# EAGLE board Sendeeinheit (EAGLE 7.7.0)
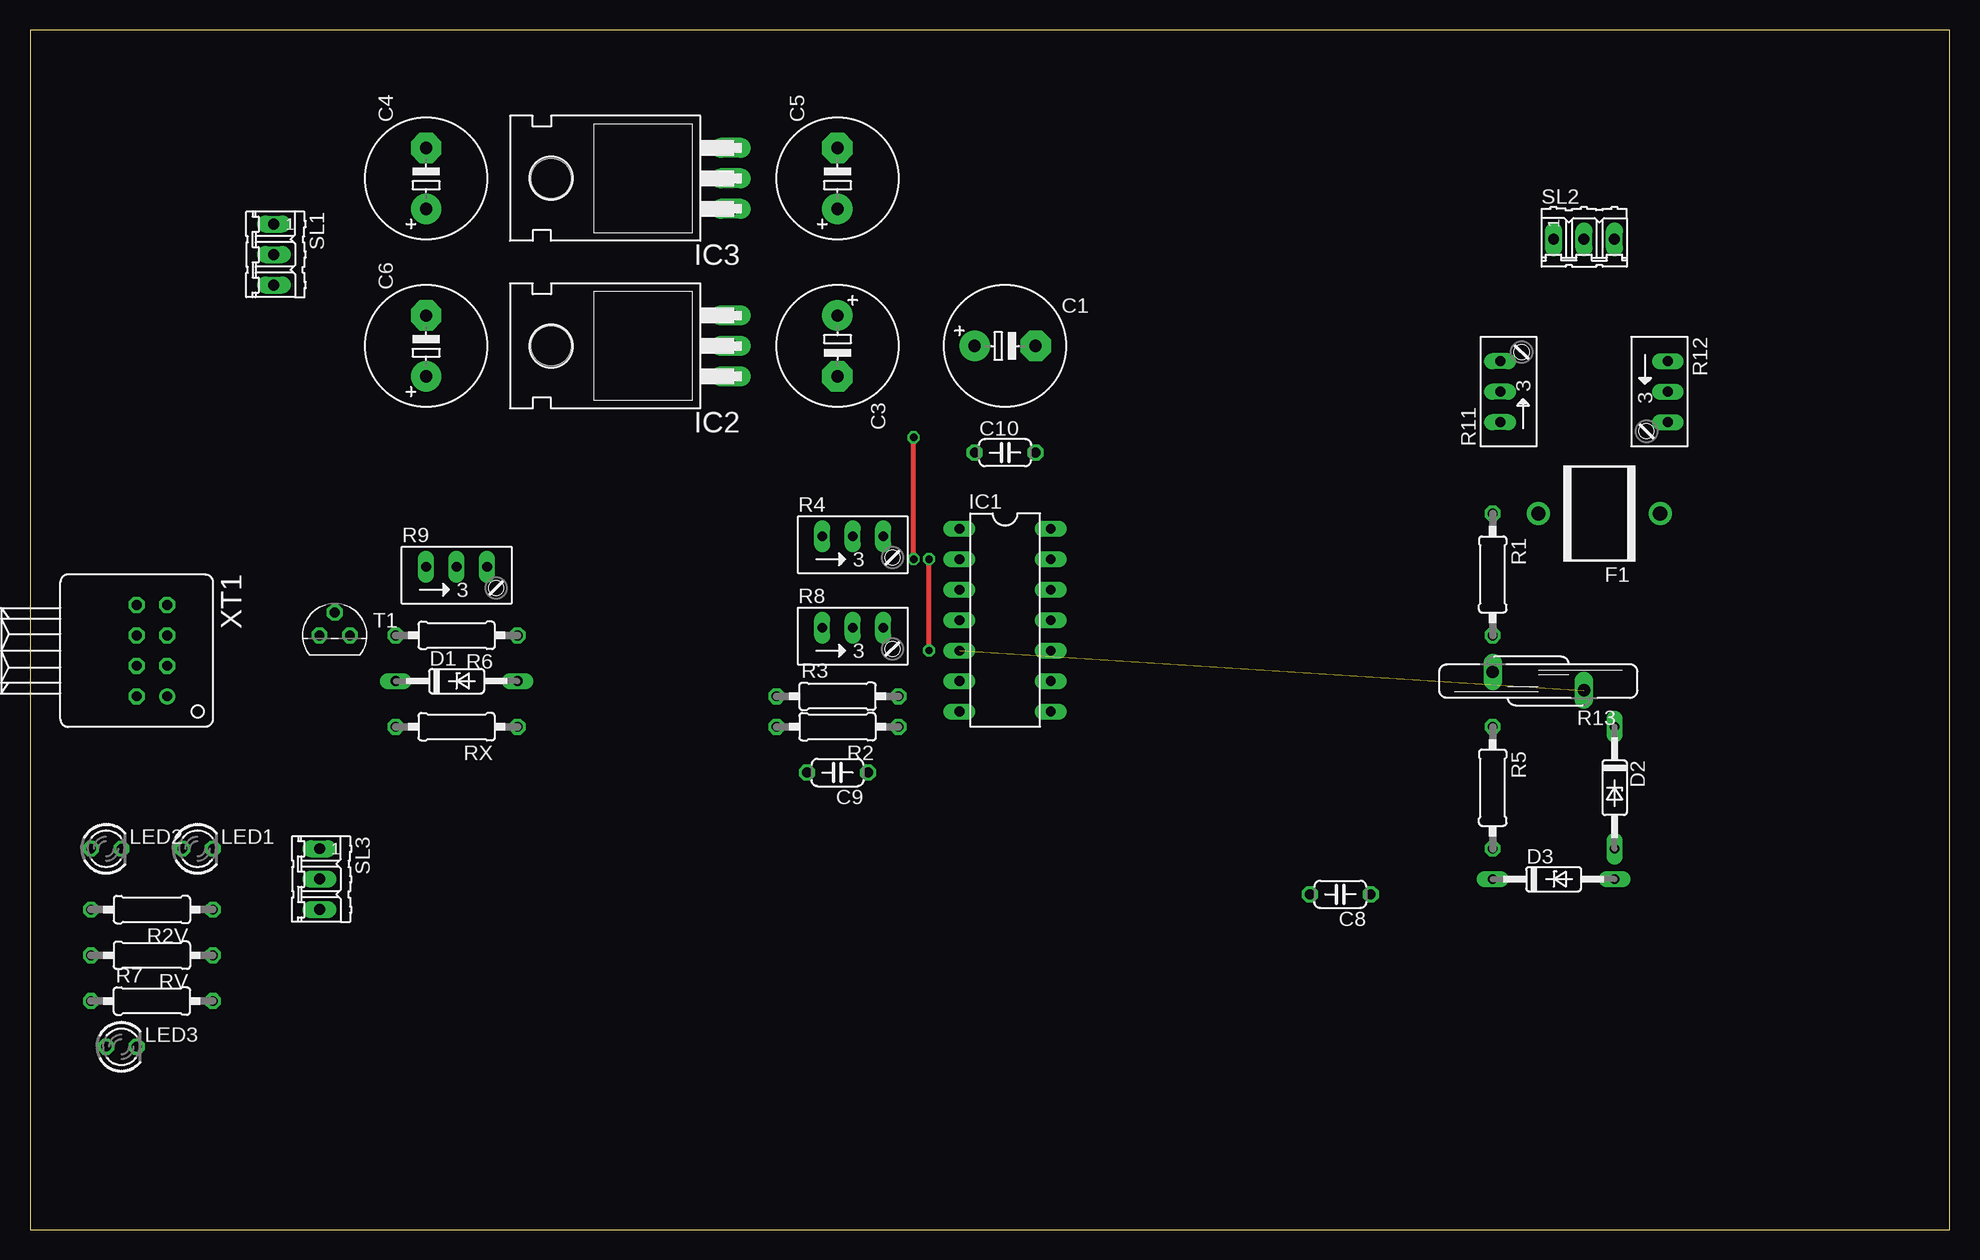
[diagram p0: board, top side]
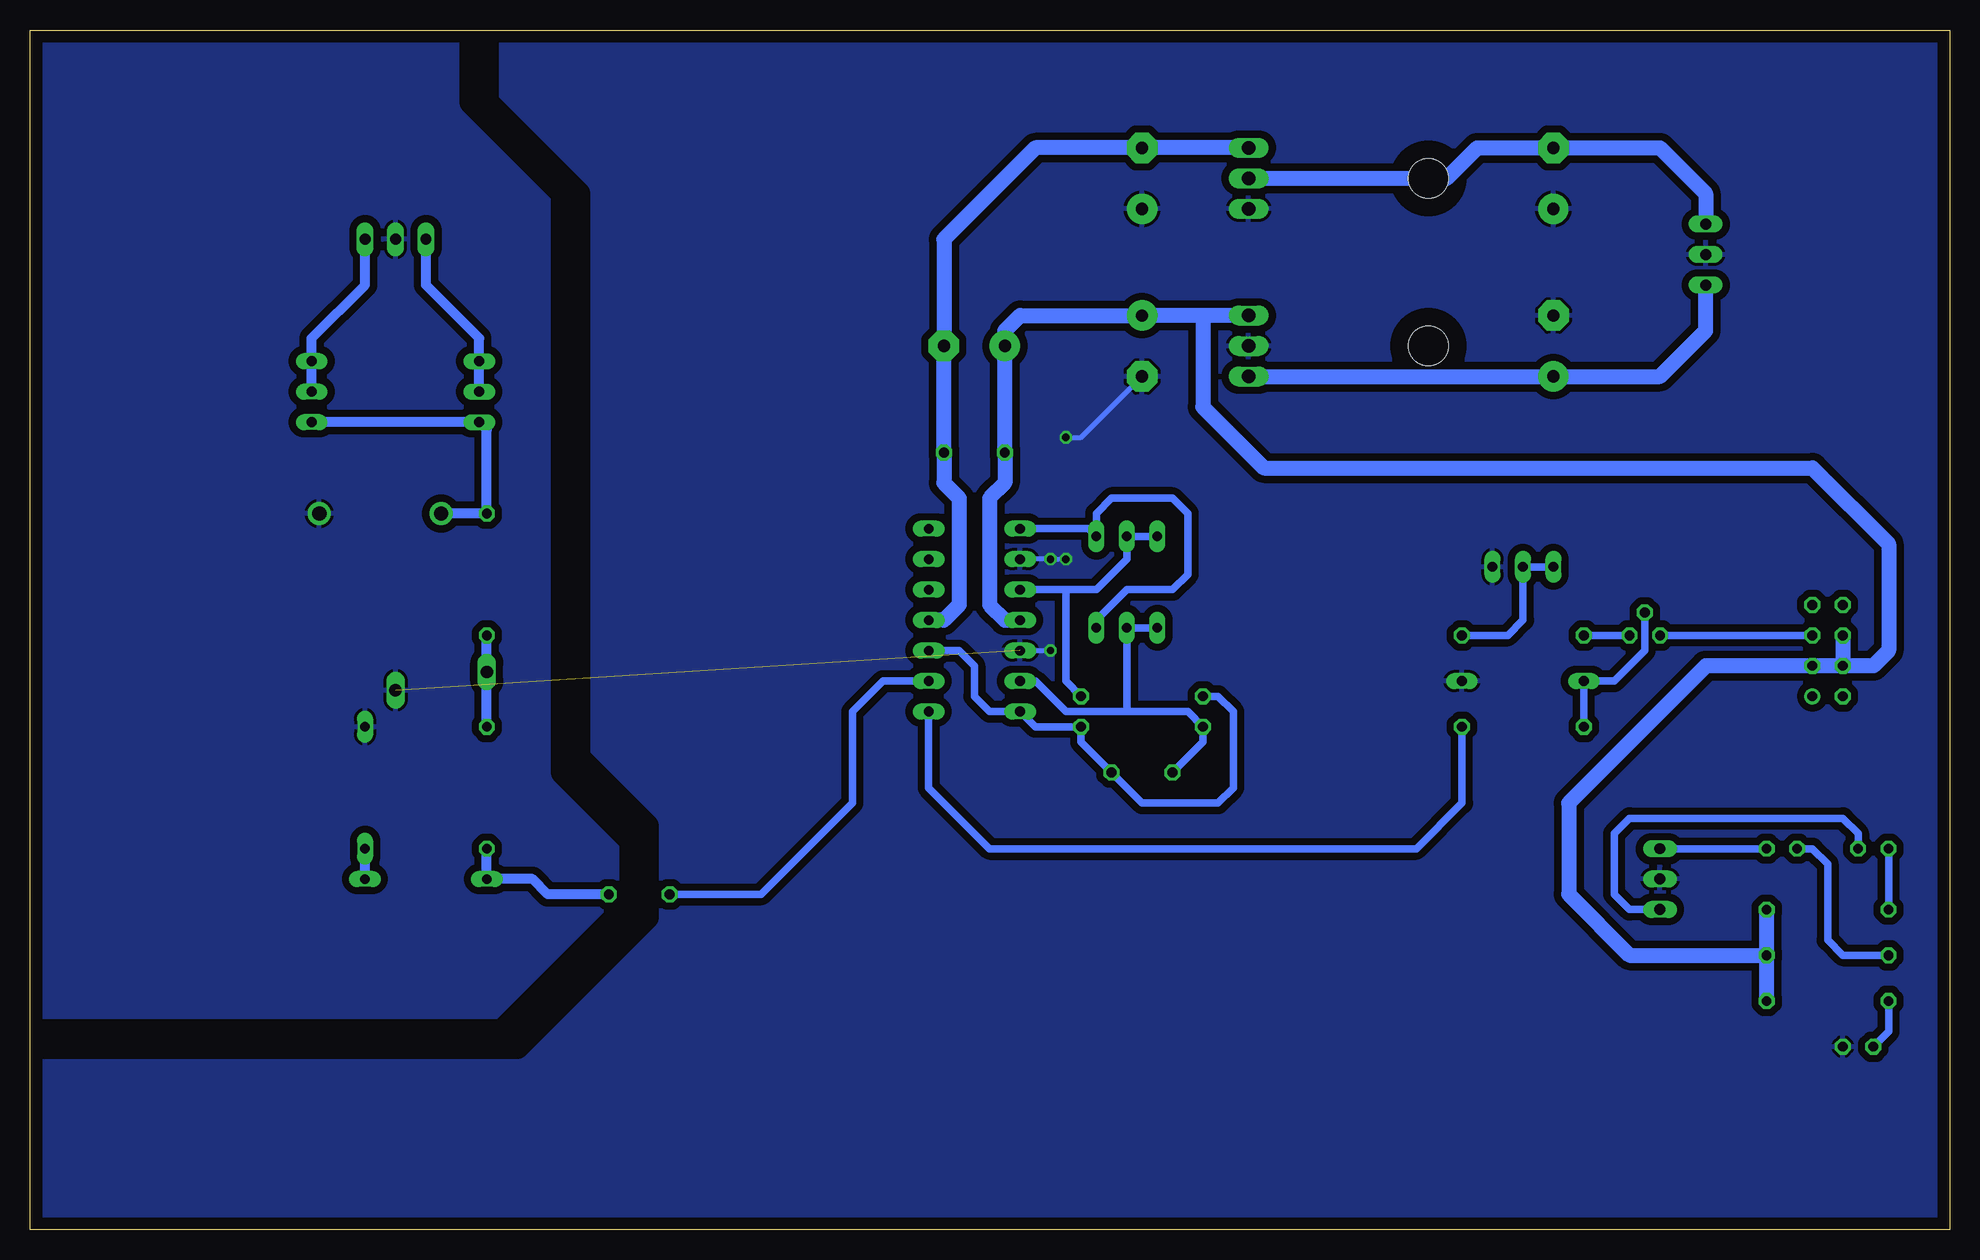
[diagram p1: board, bottom side, seen from below]

Size 160 x 100 mm. Coordinates in mm from the lower left corner, seen from the top.
Outline: 0,0 160,0 160,100 0,100 0,0
Copper layers (1*16): Top 0.035mm / dielectric 1.5mm / Bottom 0.035mm
Design rules "default": minimum track width 10mil, minimum drill 24mil, track to track 8mil, track to pad 8mil, pad to pad 8mil, via to via 8mil, smd to smd 8mil, copper to edge 40mil, drill to drill 8mil, minimum pad ring 10mil, minimum via ring 8mil, stop-mask expansion 4mil, vias tented up to drill 0mil, thermal gap 10mil
bRestrict: area 108.6,15.2 to 160,99.1

## Footprints (pad centres in the part's own frame; a part is rotated, then mirrored left to right if it is on the bottom)
E5-10,5 = drill 1.016 pad 2.54: + -2.54,0 | drill 1.016 pad 2.54 octagon: - 2.54,0
C050-024X044 = drill 0.813 octagon: 1 -2.54,0; 2 2.54,0
DO35Z10 = drill 0.813 long: A 5.08,0; C -5.08,0
EPCOS_N81 = drill 1.2 pad 1.93: 1 -5.08,0; 2 5.08,0
DIL14 = drill 0.813 long: 1 -7.62,-3.81; 2 -5.08,-3.81; 3 -2.54,-3.81; 4 0,-3.81; 5 2.54,-3.81; 6 5.08,-3.81; 7 7.62,-3.81; 8 7.62,3.81; 9 5.08,3.81; 10 2.54,3.81; 11 0,3.81; 12 -2.54,3.81; 13 -5.08,3.81; 14 -7.62,3.81
TO220H = drill 1.118 long: 1 -2.54,-10.16; 2 0,-10.16; 3 2.54,-10.16 | hole 3.302: 0,4.826
LED3MM = drill 0.813 octagon: A -1.27,0; K 1.27,0
0207/10 = drill 0.813 octagon: 1 -5.08,0; 2 5.08,0
RJ9W = drill 0.813 long: A 2.54,0.635; E -2.54,0.635; S 0,0.635
S14K11 = drill 1.016 long: 1 -0.762,-3.81; 2 0.762,3.81
03P = drill 0.914 long: 1 -2.54,0; 2 0,0; 3 2.54,0
TO92 = drill 0.813 octagon: 1 1.27,0; 2 0,1.905; 3 -1.27,0
HFBR-X41X = drill 0.813: 1 3.81,2.54 | drill 0.813 octagon: 2 1.27,2.54; 3 -1.27,2.54; 4 -3.81,2.54; 5 -3.81,0; 6 -1.27,0; 7 1.27,0; 8 3.81,0

## Placement (x,y rotation side)
C1  [E5-10,5]  81.28,73.66 0 top
C3  1µ  [E5-10,5]  67.31,73.66 270 top
C4  300n  [E5-10,5]  33.02,87.63 90 top
C5  1µ  [E5-10,5]  67.31,87.63 90 top
C6  330n  [E5-10,5]  33.02,73.66 90 top
C8  [C050-024X044]  109.22,27.94 180 top
C9  100n  [C050-024X044]  67.31,38.1 180 top
C10  [C050-024X044]  81.28,64.77 0 top
D1  [DO35Z10]  35.56,45.72 0 top
D2  7,5  [DO35Z10]  132.08,36.83 270 top
D3  7,5  [DO35Z10]  127,29.21 0 top
F1  [EPCOS_N81]  130.81,59.69 180 top
IC1  TL074P  [DIL14]  81.28,50.8 270 top
IC2  7805T  [TO220H]  48.26,73.66 90 top
IC3  7905T  [TO220H]  48.26,87.63 90 top
LED1  [LED3MM]  13.97,31.75 0 top
LED2  [LED3MM]  6.35,31.75 0 top
LED3  [LED3MM]  7.62,15.24 0 top
R1  1k  [0207/10]  121.92,54.61 270 top
R2  1M  [0207/10]  67.31,41.91 180 top
R2V  [0207/10]  10.16,26.67 180 top
R3  50k  [0207/10]  67.31,44.45 0 top
R4  100k  [RJ9W]  68.58,57.15 0 top
R5  1k  [0207/10]  121.92,36.83 270 top
R6  [0207/10]  35.56,49.53 180 top
R7  [0207/10]  10.16,19.05 0 top
R8  5k  [RJ9W]  68.58,49.53 0 top
R9  [RJ9W]  35.56,54.61 0 top
R11  50k  [RJ9W]  123.19,69.85 90 top
R12  20k  [RJ9W]  135.89,69.85 270 top
R13  S14K11  [S14K11]  125.73,45.72 90 top
RV  [0207/10]  10.16,22.86 180 top
RX  [0207/10]  35.56,41.91 180 top
SL1  [03P]  20.32,81.28 270 top
SL2  [03P]  129.54,82.55 0 top
SL3  [03P]  24.13,29.21 270 top
T1  BC547  [TO92]  25.4,49.53 0 top
XT1  HFBR-1412  [HFBR-X41X]  8.89,48.26 270 top

## Library data of the parts
C1 C3-C6 C8-C10 R1 R2 R2V R3 R5-R7 RV RX = rcl
D1-D3 = diode
F1 = discrete
IC1-IC3 = linear
LED1-LED3 = led
R4 R8 R9 R11 R12 = pot
R13 = varistor
SL1-SL3 = con-amp-quick; OC_FARNELL: unknown; OC_NEWARK: unknown
T1 = transistor
XT1 = fiber-optic-hp; MF: AGILENT TECHNOLOGIES; MPN: HFBR-1412; OC_FARNELL: 1173153; OC_NEWARK: 06F6037

## Nets
+5V: C1.+ C3.+ C10.1 IC1.4 IC2.3 R2V.1 R7.2 RV.1 XT1.2 XT1.6 XT1.7
-5V: C1.- C5.- C10.2 IC1.11 IC3.3
AC_IN: C8.2 IC1.9
GND: C3.- C4.+ C5.+ C6.- D1.A D2.C F1.1 IC1.2 IC1.5 IC2.2 IC3.1 LED3.K R9.A R13.1 SL1.2 SL2.2 SL3.2
N$1: C6.+ IC2.1 SL1.3
N$2: C4.- IC3.2 SL1.1
N$3: R12.E R12.S SL2.3
N$4: R11.A R11.S SL2.1
N$5: F1.2 R1.1 R11.E R12.A
N$7: D2.A D3.A
N$8: R1.2 R5.1 R13.2
N$9: C8.1 D3.C R5.2
N$10: C9.2 IC1.6 R2.2 R8.E R8.S
N$12: LED2.K SL3.3
N$13: LED1.K SL3.1
N$14: LED2.A R2V.2
N$15: LED1.A RV.2
N$16: LED3.A R7.1
N$17: IC1.1 R4.A R8.A
N$18: IC1.3 R3.2 R4.E R4.S
N$19: T1.3 XT1.3
N$20: D1.C RX.2 T1.2
N$21: R6.2 T1.1
N$22: R6.1 R9.E R9.S
PWM: IC1.8 RX.1
TRIANGLE: C9.1 IC1.7 IC1.10 R2.1 R3.1

## Tracks (layer width: path | path; a pad name or v marks a point on that pad's centre or on a via)
+5V
  Bottom 1.27: IC2.3 62.23,76.2 | 62.23,76.2 C3.+ 77.47,76.2 78.74,74.93 C1.+ C10.1 78.74,62.23 80.01,60.96 80.01,52.07 78.74,50.8 IC1.4 | 62.23,76.2 62.23,68.58 57.15,63.5 11.43,63.5 5.08,57.15 5.08,48.26 6.35,46.99 XT1.7 | XT1.7 XT1.2 20.32,46.99 31.75,35.56 31.75,27.94 26.67,22.86 RV.1 | XT1.6 XT1.7 | R7.2 RV.1 | RV.1 R2V.1
-5V
  Bottom 1.27: IC3.3 C5.- 76.2,90.17 83.82,82.55 C1.- C10.2 83.82,62.23 82.55,60.96 82.55,52.07 83.82,50.8 IC1.11
AC_IN
  Bottom 0.61: C8.2 99.06,27.94 91.44,35.56 91.44,43.18 88.9,45.72 IC1.9
GND  (via drill 0.6)  (1 unrouted)
  Top 0.406: v74.93,48.26 v74.93,55.88 | v73.66,55.88 v73.66,66.04
  Bottom 0.406: IC1.5 v74.93,48.26 | IC1.2 v74.93,55.88 v73.66,55.88 | v73.66,66.04 72.39,66.04 C3.-
  pour Bottom (isolate 0.61): 0,100.33 0,0 160.02,0 160.02,100.33
N$1
  Bottom 1.27: IC2.1 C6.+ 24.13,71.12 20.32,74.93 SL1.3
N$2
  Bottom 1.27: IC3.2 41.91,87.63 39.37,90.17 C4.- 24.13,90.17 20.32,86.36 SL1.1
N$3
  Bottom 0.813: R12.S R12.E 136.53,74.3 132.08,78.74 SL2.3
N$4
  Bottom 0.813: R11.S R11.A 122.56,74.3 127,78.74 SL2.1
N$5
  Bottom 0.813: F1.2 R1.1 121.92,66.67 R11.E R12.A
N$7
  Bottom 0.813: D3.A D2.A
N$8
  Bottom 0.813: R5.1 R13.2 R1.2
N$9
  Bottom 0.813: C8.1 116.84,27.94 118.11,29.21 D3.C R5.2
N$10
  Bottom 0.61: IC1.6 76.2,45.72 73.66,43.18 68.58,43.18 | 68.58,43.18 63.5,43.18 R2.2 62.23,40.64 C9.2 | 68.58,43.18 R8.S R8.E
N$12
  Bottom 0.61: SL3.3 26.67,26.67 27.94,27.94 27.94,33.02 26.67,34.29 8.89,34.29 7.62,33.02 LED2.K
N$13
  Bottom 0.61: LED1.K SL3.1
N$14
  Bottom 0.61: R2V.2 LED2.A
N$15
  Bottom 0.61: LED1.A 11.43,31.75 10.16,30.48 10.16,24.13 8.89,22.86 RV.2
N$16
  Bottom 0.61: LED3.A 5.08,16.51 R7.1
N$17
  Bottom 0.61: IC1.1 71.75,58.42 R4.A 71.12,59.69 69.85,60.96 64.77,60.96 63.5,59.69 63.5,54.61 64.77,53.34 68.58,53.34 71.12,50.8 R8.A
N$18
  Bottom 0.61: IC1.3 73.66,53.34 | 73.66,53.34 71.12,53.34 68.58,55.88 R4.S R4.E | R3.2 73.66,45.72 73.66,53.34
N$19
  Bottom 0.61: XT1.3 T1.3
N$20
  Bottom 0.61: T1.2 25.4,48.26 27.94,45.72 D1.C RX.2
N$21
  Bottom 0.61: R6.2 T1.1
N$22
  Bottom 0.61: R9.E R9.S 35.56,50.8 36.83,49.53 R6.1
PWM
  Bottom 0.61: IC1.8 85.09,36.83 80.01,31.75 44.45,31.75 40.64,35.56 RX.1
TRIANGLE
  Bottom 0.61: R3.1 60.96,44.45 59.69,43.18 59.69,36.83 60.96,35.56 67.31,35.56 C9.1 72.39,40.64 R2.1 76.2,41.91 IC1.7 80.01,43.18 81.28,44.45 81.28,46.99 82.55,48.26 IC1.10